# Altium PCB Gate Driver Board.PcbDoc
Units mm, origin at the board's own origin, x right, y up, seen from the top; angles counter-clockwise.
Board outline 49.05 x 43.25 mm, 2 copper layers (Top Layer, Bottom Layer); 46 components, 28 nets, 120 pads, 56 vias.
Unrouted connection lines stored in the file: 4.
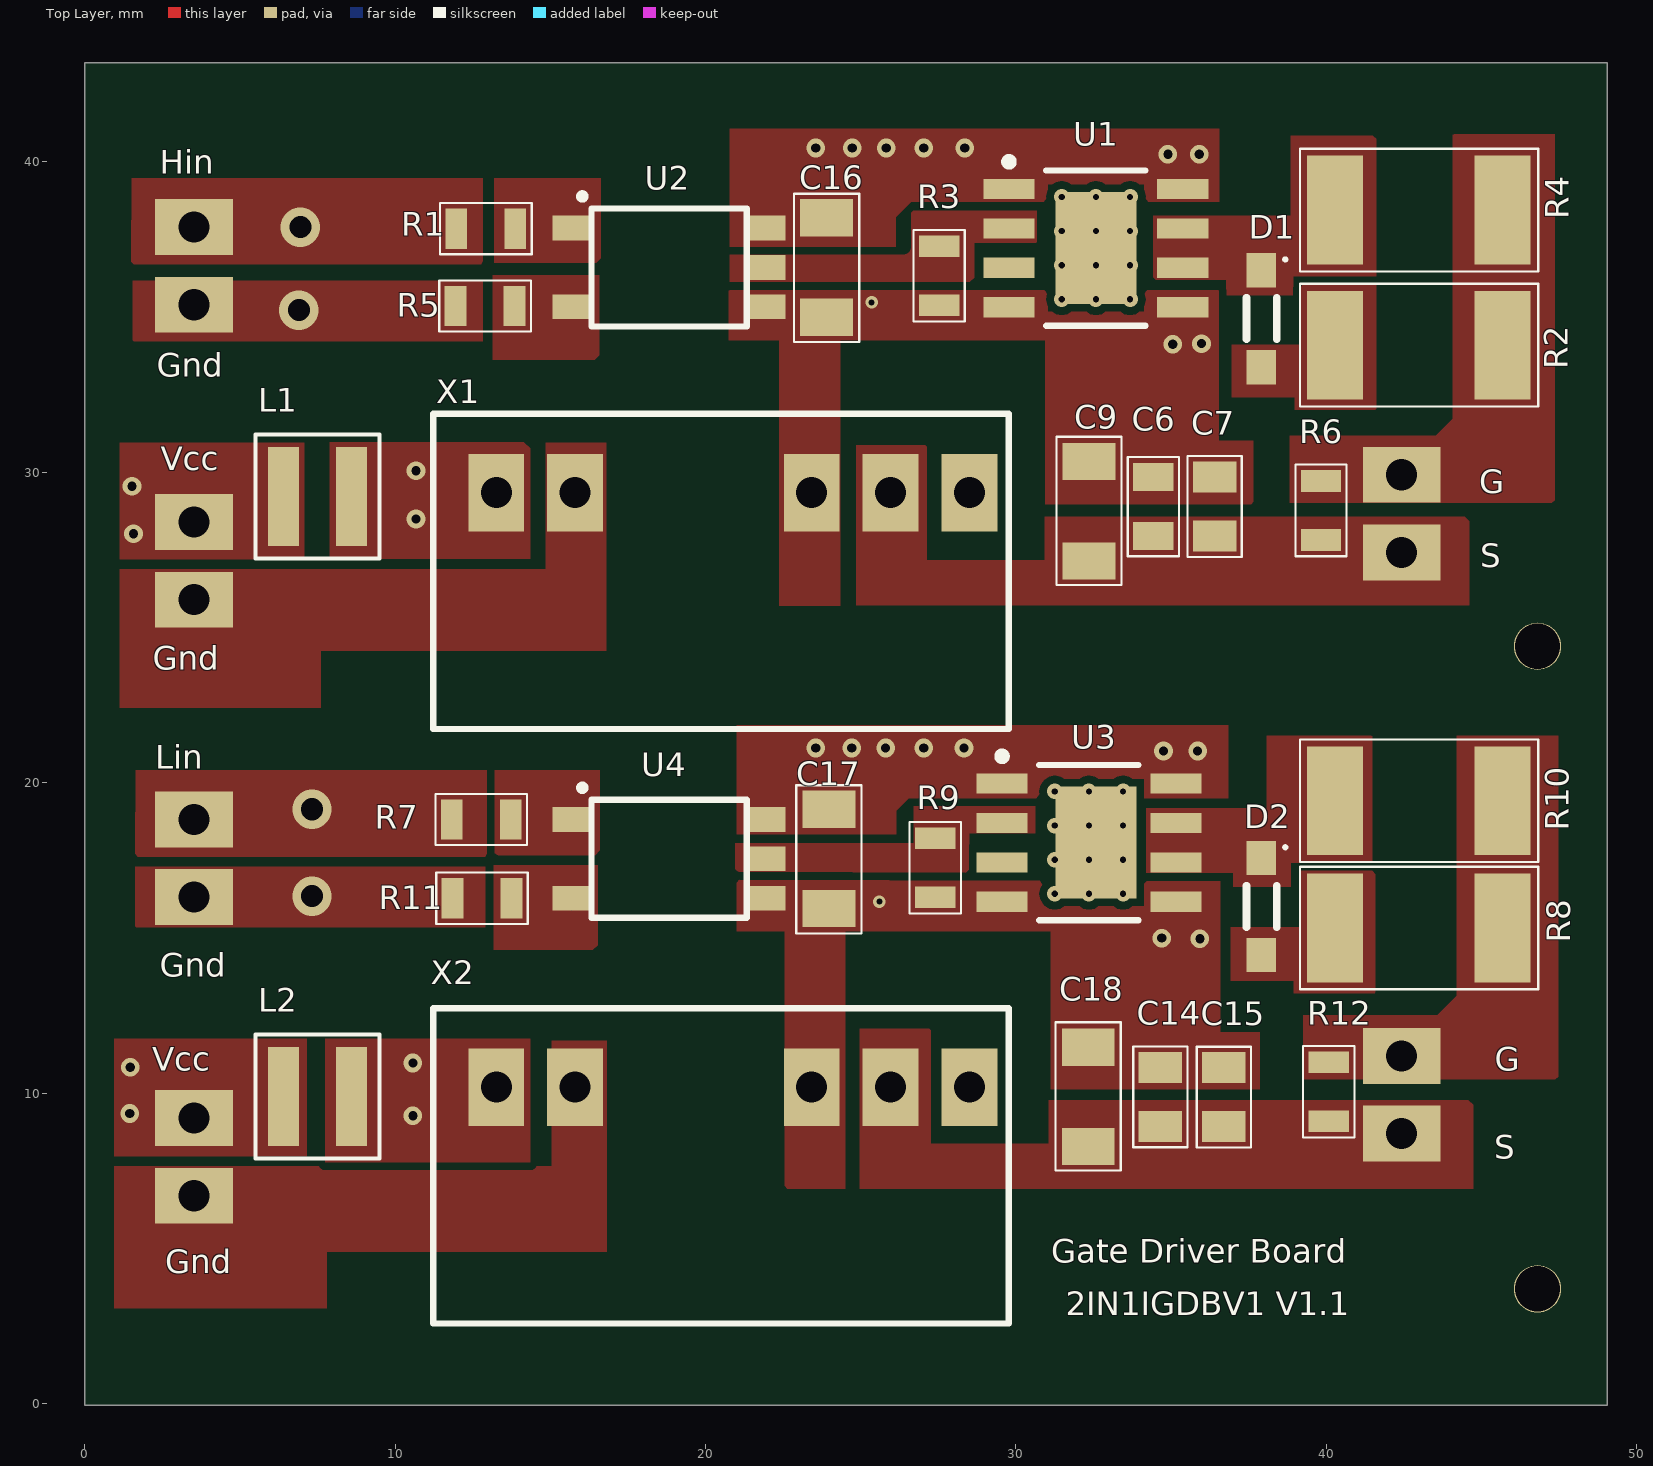
[diagram p0: Top Layer view]
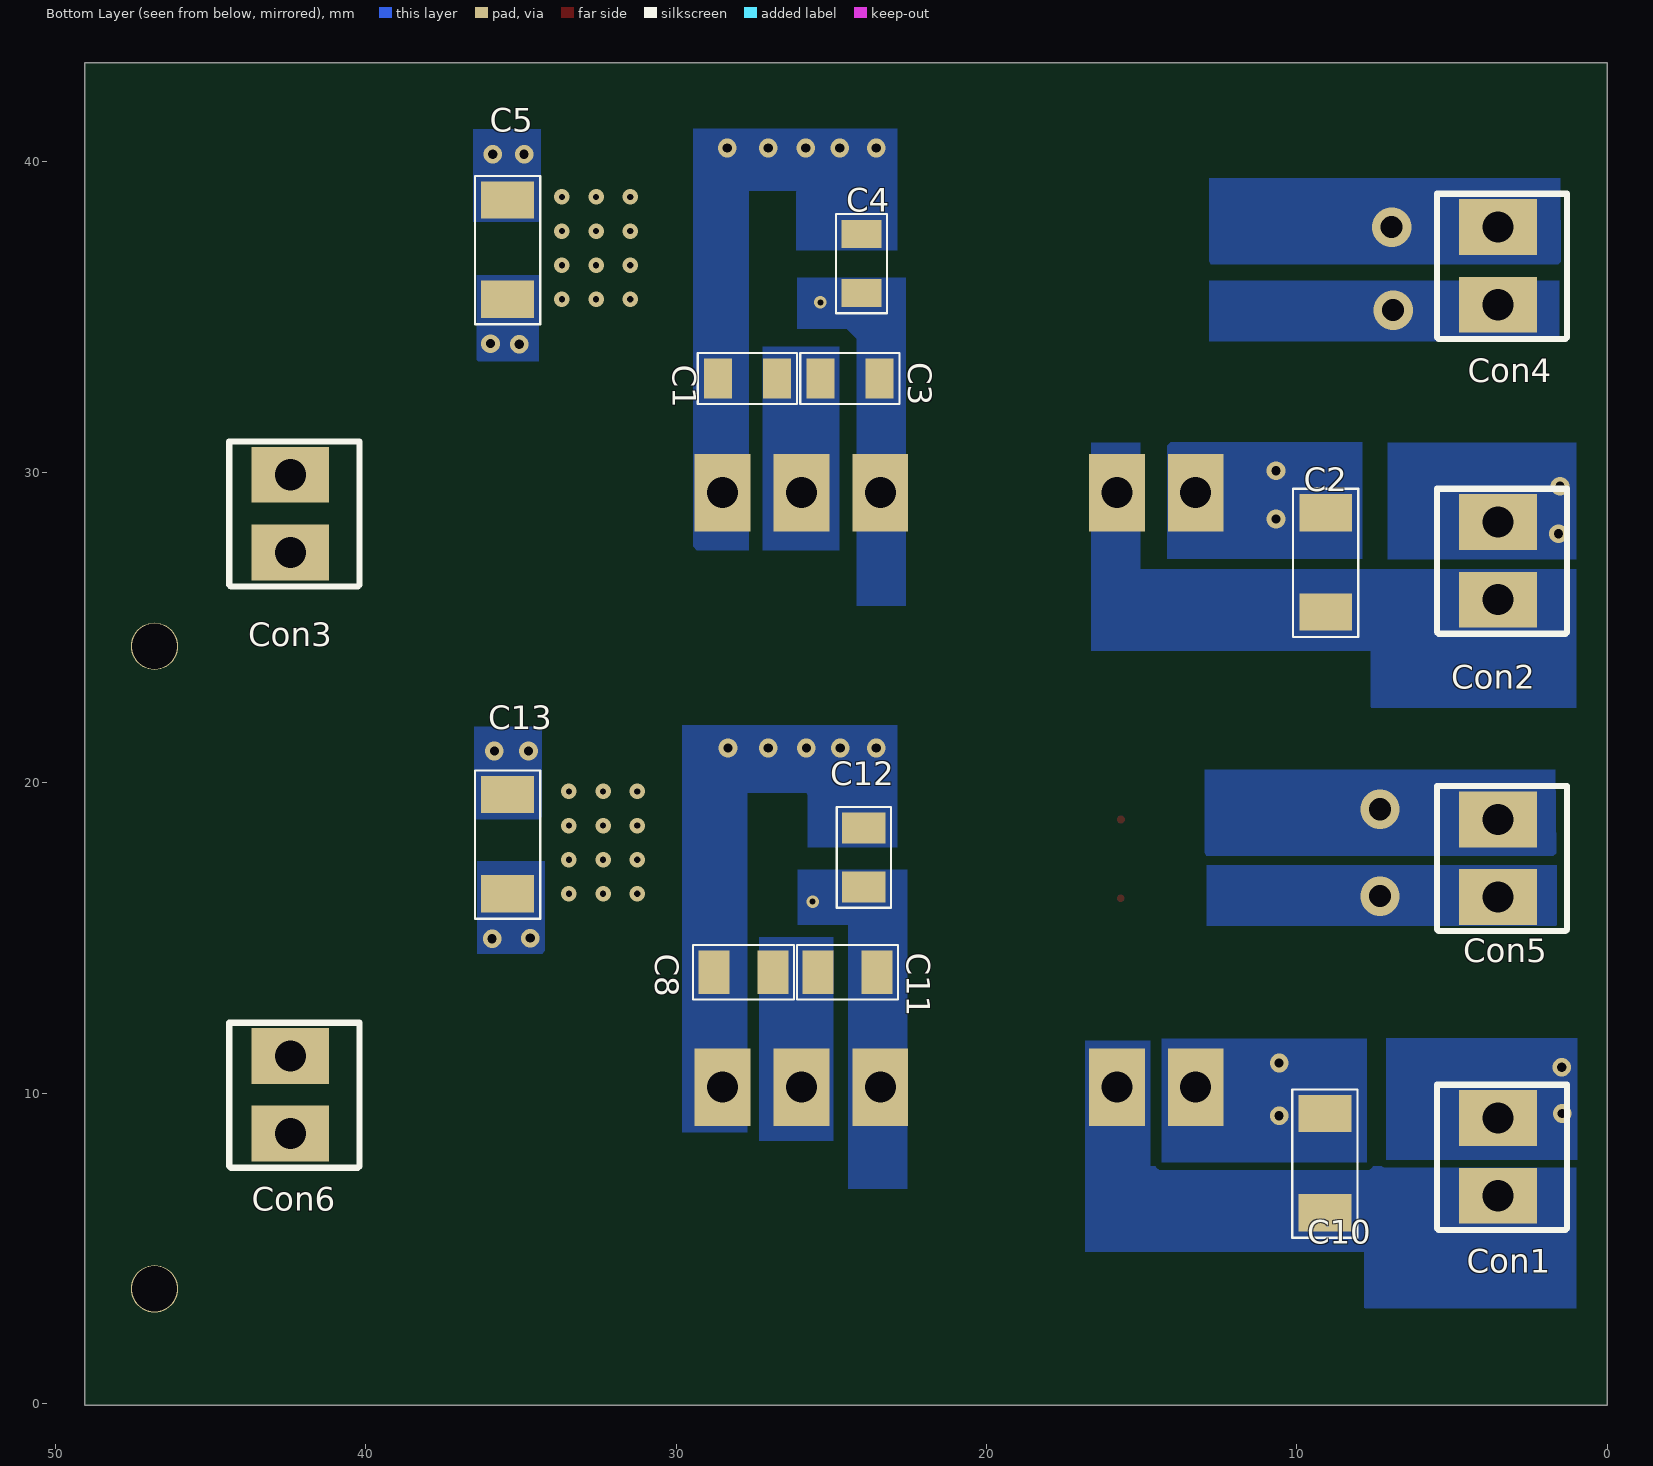
[diagram p1: Bottom Layer view, seen from below]
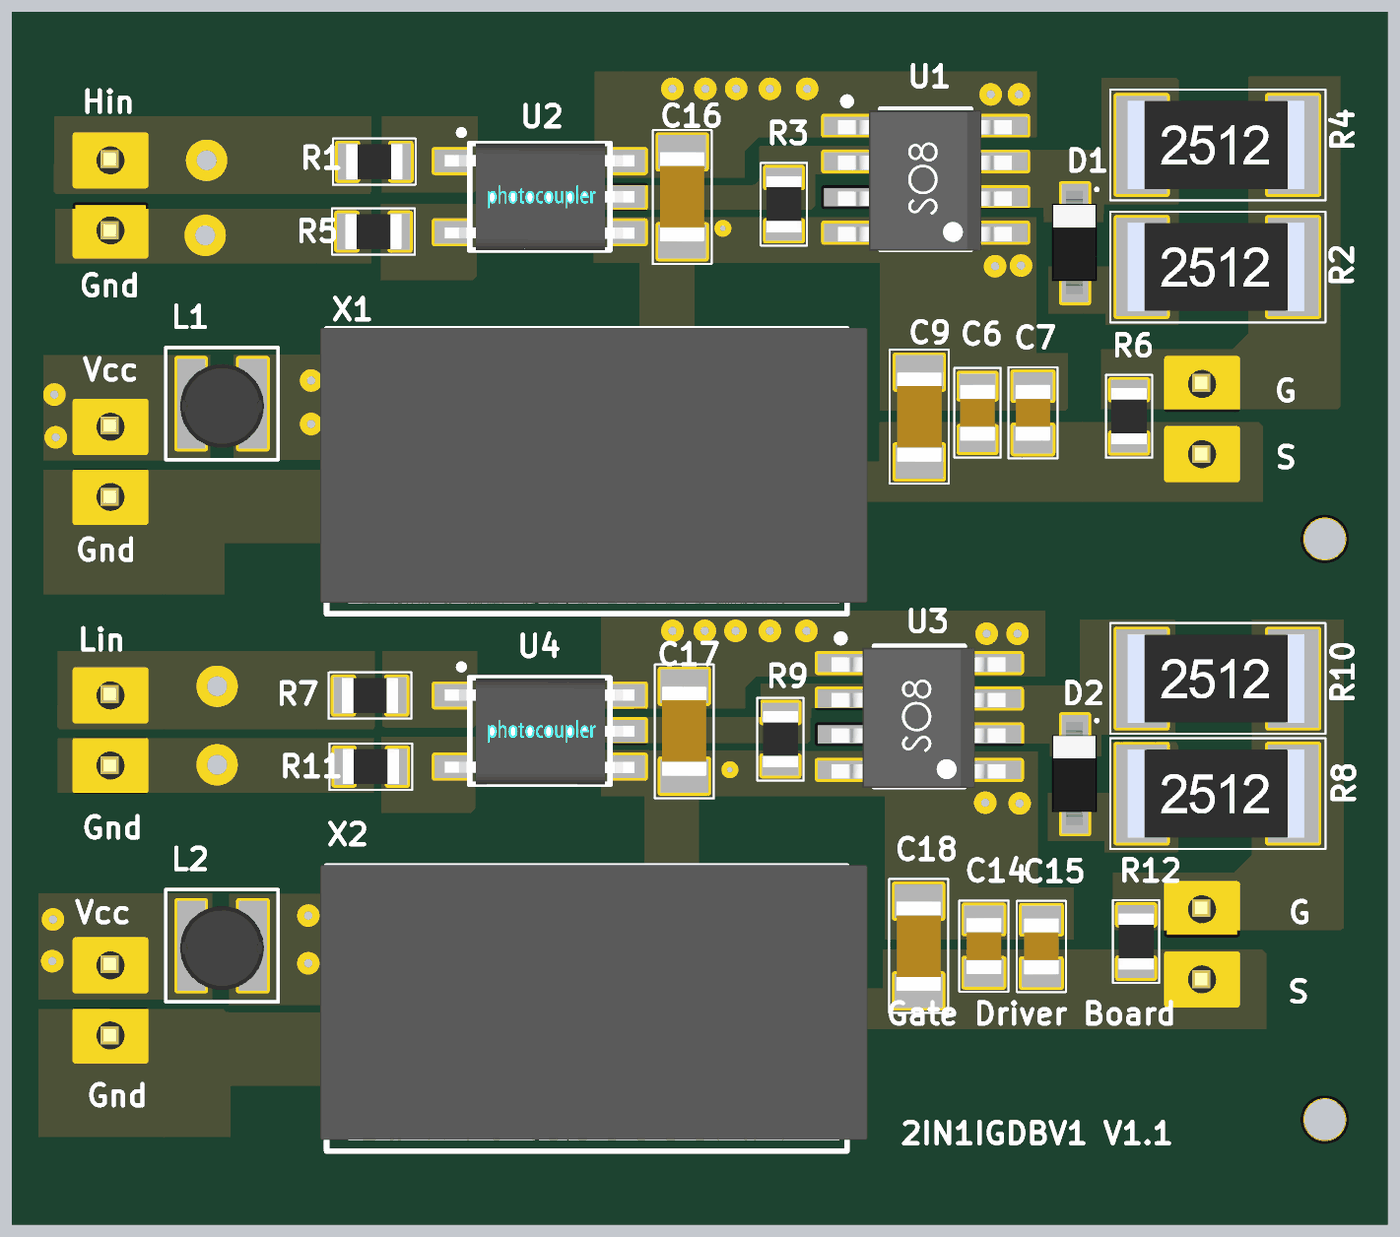
[diagram p2: 3D render of the assembled board from above, using the file's embedded part models]
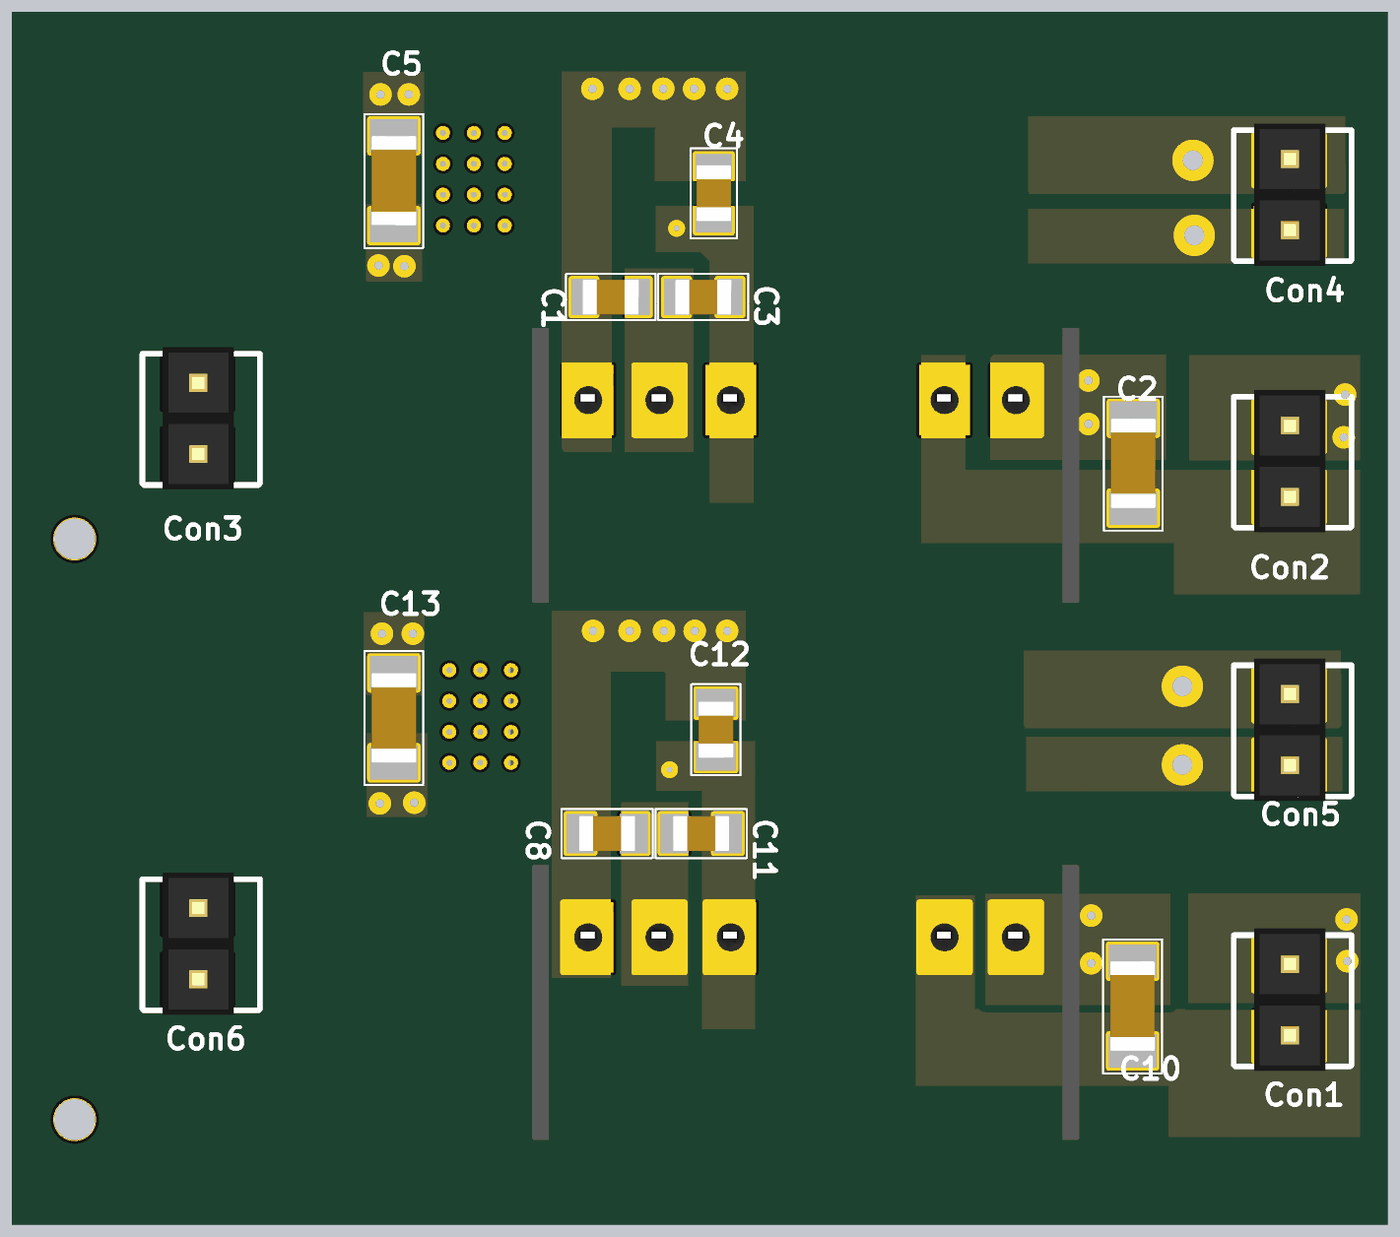
[diagram p3: 3D render of the assembled board from below, using the file's embedded part models]

## Layer stack, top to bottom
Top Solder: solder mask 0.0102, Solder Resist, Dk 3.5
Top Layer: signal copper 0.0356
Dielectric 1: dielectric 0.32, FR-4, Dk 4.8
Bottom Layer: signal copper 0.0356
Bottom Solder: solder mask 0.0102, Solder Resist, Dk 3.5

## Board outline
0,-0.05 0,43.2 49.05,43.2 49.05,-0.05

## Design rules (kind name [scope] priority, off if disabled: settings)
Clearance [All] p1: gap=0.254 ignorepadtopadclearanceinfootprint=FALSE except(0: Arc-Hole Track-Hole SMDPad-Hole THPad-Hole Via-Hole Fill-Hole Poly-Hole Region-Hole Text-Hole)
PolygonConnect PolygonConnect_1 [All] p1: connectstyle=Direct reliefconductorwidth=0.254 reliefentries=4 polygonreliefangle="90 Angle" airgapwidth=0.254
PolygonConnect [All] p2: connectstyle=Relief reliefconductorwidth=0.254 reliefentries=4 polygonreliefangle="90 Angle" airgapwidth=0.254
RoutingVias [All] p1: holewidth=0.711 width=1.27 viastyle="Through Hole" minholewidth=0.711 minwidth=1.27 maxholewidth=0.711 maxwidth=1.27
SolderMaskExpansion [All] p1: expansion=0.102 istentingtop=FALSE
Width [All] p1: maxlimit=1 minlimit=0.254 preferedwidth=0.254 minimp=50.000000 maximp=50.000000 favimp=50.000000
30 further rules are at their usual default settings.

## Components (designator, comment, footprint, x,y, rotation, side; value= is the part's Value field where it differs from the comment)
C1 "2.2u" C-0805#1 27.7,33.025 r0 bottom
C2 "4.7uF" C-1206 9.075,27.1 r90 bottom
C3 "2.2u" C-0805#1 24.4,33.025 r0 bottom
C4 "100n" C-0805#1 24.025,36.725 r90 bottom
C5 "4.7uF" C-1206 35.426,37.175 r90 bottom
C6 "10n" C-0805#1 34.425,28.9 r90 top
C7 "100n" C-0805#2 36.4,28.9 r90 top
C8 "2.2u" C-0805#2 27.825,13.9 r0 bottom
C9 "4.7uF" C-1206 32.35,28.75 r270 top
C10 "4.7uF" C-1206 9.1,7.75 r90 bottom
C11 "2.2u" C-0805#2 24.475,13.9 r0 bottom
C12 "100n" C-0805#2 23.95,17.6 r90 bottom
C13 "4.7uF" C-1206 35.426,18.025 r90 bottom
C14 "10n" C-0805#2 34.65,9.888 r90 top
C15 "100n" C-0805#2 36.7,9.875 r90 top
C16 "4.7uF" C-1206 23.9,36.6 r90 top
C17 "4.7uF" C-1206 23.975,17.55 r90 top
C18 "4.7uF" C-1206 32.325,9.888 r270 top
Con1 "Connector" Conn 3.525,9.175 r180 bottom
Con2 "Connector" Conn 3.525,28.375 r180 bottom
Con3 "Connector2_1" Conn 42.425,29.9 r180 bottom
Con4 "Connector2" Conn 3.525,37.875 r180 bottom
Con5 "Connector3" Conn 3.525,18.8 r180 bottom
Con6 "Connector2_2" Conn 42.425,11.175 r180 bottom
D1 "1n5819" SOD123 37.85,36.45 r270 top
D2 "1n5819" SOD123 37.85,17.512 r270 top
L1 "10uH" WE-TPC_282892 7.5,29.225 r90 top
L2 "10uH" WE-TPC_282892 7.5,9.9 r90 top
R1 "510" R-0805 12.925,37.85 r0 top
R2 "10 1w" R-2512 42.975,34.1 r0 top
R3 "47k" R-0805 27.525,36.337 r90 top
R4 "10 1w" R-2512 42.975,38.45 r0 top
R5 "510" R-0805 12.9,35.36 r0 top
R6 "47k" R-0805 39.825,28.775 r90 top
R7 "510" R-0805 12.775,18.82 r0 top
R8 "10 1w" R-2512 42.975,15.325 r0 top
R9 "47k" R-0805 27.4,17.263 r90 top
R10 "10 1w" R-2512 42.975,19.425 r0 top
R11 "510" R-0805 12.8,16.284 r0 top
R12 "47k" R-0805 40.075,10.05 r90 top
U1 "IXDN614" "FAN3122 Soic8"#1 32.575,37.225 r0 top
U2 "TLP152" TLP152 18.825,36.35 r0 top
U3 "IXDN614" "FAN3122 Soic8"#2 32.351,18.075 r0 top
U4 "TLP152" TLP152 18.825,17.3 r0 top
X1 "R24P21503D" SIP7 13.26,29.35 r90 top
X2 "R24P21503D" SIP7 13.26,10.2 r90 top

## Footprints (in the part's own frame and the unit in brackets; to place one, negate y for a bottom-side part, rotate by r counter-clockwise, add the part's x,y. Pads: shape width x height; smd on the part's side, far side on the other; paste and mask are expansions set on the pad)
C-0805#1 [mm]
  rect 0.9x1.3 smd: 1(-0.95,0) 2(0.95,0)
  silkscreen extent -1.6,-0.83 1.6,0.83, body extent -1,-0.62 1,0.63, height 1.01
C-0805#2 [mm]
  rect 1x1.4 smd: 1(-0.95,0) 2(0.95,0)
  silkscreen extent -1.62,-0.87 1.62,0.87, body extent -1,-0.62 1,0.63, height 1.01
C-1206 [mm]
  rect 1.2x1.7 smd: 1(-1.6,0) 2(1.6,0)
  silkscreen extent -2.4,-1.05 2.37,1.05, body extent -1.6,-0.8 1.6,0.8, height 1
Conn [mm]
  rect 2.5x1.8 hole 1: 1(0,0.025) 2(0,-2.475)
  silkscreen extent -1.96,-3.57 2.22,1.1, body extent -1.24,-3.74 1.3,1.34, height 8.15
"FAN3122 Soic8"#1 [mm] "SOIC, 8-Leads, Body 4.95x3.95mm, Pitch 1.27mm, Thermal Pad 4.10x3.10mm, IPC Medium Density"
  rect 1.65x0.65 smd: 1(-2.8,1.905) 2(-2.8,0.635) 3(-2.8,-0.635) 4(-2.8,-1.905) 5(2.8,-1.905) 6(2.8,-0.635) 7(2.8,0.635) 8(2.8,1.905)
  rect 2.6x3.6 smd: 9(0,0)
  silkscreen extent -2.92,-2.5 1.6,2.9, body extent -3.12,-2.55 3.08,2.45, height 1.66
"FAN3122 Soic8"#2 [mm] "SOIC, 8-Leads, Body 4.95x3.95mm, Pitch 1.27mm, Thermal Pad 4.10x3.10mm, IPC Medium Density"
  rect 1.65x0.65 smd: 1(-2.8,1.905) 2(-2.8,0.635) 3(-2.8,-0.635) 4(-2.8,-1.905) 5(2.8,-1.905) 6(2.8,-0.635) 7(2.8,0.635) 8(2.8,1.905)
  rect 2.6x3.6 smd: 9(0.224,0)
  silkscreen extent -2.92,-2.5 1.6,2.9, body extent -3.12,-2.55 3.08,2.45, height 1.66
R-0805 [mm]
  rect 0.7x1.3 smd: 1(-0.95,0) 2(0.95,0)
  silkscreen extent -1.47,-0.82 1.48,0.82, body extent -1,-0.62 1,0.62, height 0.56
R-2512 [mm]
  rect 1.8x3.5 smd: 1(-2.7,0) 2(2.7,0)
  silkscreen extent -3.83,-1.97 3.85,1.97, body extent -3.21,-1.57 3.09,1.58, height 0.59
SIP7 [mm]
  rect 2.5x1.8 hole 1: 1(0,0) 2(0,-2.54) 5(0,-10.16) 6(0,-12.7) 7(0,-15.24)
  silkscreen extent -7.62,-16.51 2.54,2.03, body extent -7.24,-17.24 2.58,2.26, height 11.66
SOD123 [mm]
  rect 1.1x0.95 smd: a(3.062,0.05) k(-0.063,0.05)
  silkscreen extent -0.46,-0.42 2.15,0.87, body extent -0.37,-0.77 3.33,0.83, height 1.28
TLP152 [mm] "SOTFL, 5-Leads, Body 3.75x7.20mm, Pitch 1.27mm, IPC Medium Density"
  rect 1.2x0.8 smd: 1(-3.15,1.524) 2(-3.15,-1.016) 3(3.15,-1.016) 4(3.15,0.254) 5(3.15,1.524)
  silkscreen extent -2.87,-1.65 2.5,2.61, body extent -3.39,-1.65 3.38,2.15, height 2.11
WE-TPC_282892 [mm]
  rect 3.2x1 smd: 1(0,1.1) 2(0,-1.1)
  silkscreen extent -2,-2 2,2, body extent -1.58,-1.5 1.41,1.5, height 3

## Part data
C1 C3 C4 C6 C7 C8 C11 C12 C14 C15: library part C-0805
C2 C9 C10 C18: library part Cap1206
C5 C13 C16 C17: library part C-1206
D1 D2: library part 1N4148W-E3-18, "Diode Small Signal Switching 100V 0.15A 2-Pin SOD-123 T/R", Average Rectified Current=150mA, Forward Voltage=1.2V, Manufacturer=Vishay, Max Operating Temperature=150°C, Max Power Dissipation=350mW, Max Repetitive Reverse Voltage (Vrrm)=100V, Max Reverse Leakage Current=5uA, Max Reverse Voltage (DC)=75V, Max Surge Current=2A, Min Operating Temperature=-55°C, Package Quantity=10000, Peak Reverse Current=100uA, Supplier Part Number 1=70061597, ComponentLink1Description=https://datasheet.ciiva.com/29885/1n4148w-29885941.pdf?src-supplier=Avnet, ComponentLink1URL=https://datasheet.ciiva.com/29885/1n4148w-29885941.pdf?src-supplier=Avnet, ComponentLink2Description=https://datasheet.ciiva.com/29593/1n4148w-29593113.pdf?src-supplier=Digi-Key, ComponentLink2URL=https://datasheet.ciiva.com/29593/1n4148w-29593113.pdf?src-supplier=Digi-Key, ComponentLink3Description=https://datasheet.ciiva.com/29593/1n4148w-29593111.pdf?src-supplier=Digi-Key, ComponentLink3URL=https://datasheet.ciiva.com/29593/1n4148w-29593111.pdf?src-supplier=Digi-Key, ComponentLink4Description=https://datasheet.ciiva.com/29593/1n4148w-29593112.pdf?src-supplier=Digi-Key, ComponentLink4URL=https://datasheet.ciiva.com/29593/1n4148w-29593112.pdf?src-supplier=Digi-Key, Contact Plating=Tin, Element Configuration=Single, Forward Current=150mA, Height=1.25mm, Lead Free="Lead Free", Length=2.85mm, Manufacturer Part Number=1N4148W-E3-18, Mount="Surface Mount", Number of Pins=2, Packaging="Tape and Reel", Peak Non-Repetitive Surge Current=2A, Power Dissipation=350mW, Pricing 1="1 = 0.03900, 25 = 0.03800, 100 = 0.03600, 250 = 0.03400, 500 = 0.03200, 1000 = 0.03100, 2500 = 0.02900 (USD)", Radiation Hardening=No, Recovery Time=4ns, Reverse Recovery Time=4ns, RoHS=Yes, Stock 1=6838, Supplier 1="Allied Electronics", Weight=0.000363oz, Width=1.7mm
L1 L2: library part inductor
R1 R3 R5 R6 R7 R9 R11 R12: library part Res0805
R2 R4 R8 R10: library part R-2512
U1 U3: library part IXDN614SITR, "14A 8SOIC EXP MTL NON INVERTING", Case/Package=SOIC, Manufacturer="Ixys Clare", Max Operating Temperature=125°C, Max Output Current=14A, Max Supply Voltage=35V, Min Operating Temperature=-40°C, Min Supply Voltage=4.5V, Package Quantity=2000, Supplier Part Number 1=849-IXDN614SITR, ComponentLink1Description=https://datasheet.ciiva.com/6613/ixd-614-6613145.pdf?src-supplier=Digi-Key, ComponentLink1URL=https://datasheet.ciiva.com/6613/ixd-614-6613145.pdf?src-supplier=Digi-Key, Fall Time=25ns, Lead Free="Lead Free", Manufacturer Part Number=IXDN614SITR, Mount="Surface Mount", Number of Drivers=1, Number of Outputs=1, Number of Pins=8, Packaging="Tape and Reel", Pricing 1="1 = 4.24000, 10 = 3.79000, 50 = 3.41000, 100 = 3.10000, 1000 = 2.12000, 10000 = 1.90000 (USD)", Propagation Delay=70ns, Rise Time=35ns, RoHS=Yes, Supplier 1=Mouser
U2 U4: library part TLP152(TPL,E, "OPTOISO 3.75KV GATE DRIVER 6SO-5", Case/Package=SO, Forward Current=10mA, Forward Voltage=1.57V, High Level Output Current=2A, Manufacturer=Toshiba, Max Operating Temperature=100°C, Max Output Current=2.5A, Max Power Dissipation=260mW, Min Operating Temperature=-40°C, Package Quantity=3000, Supplier Part Number 1=757-TLP152TPLE, ComponentLink1Description=https://datasheet.ciiva.com/41848/tlp152-datasheet-en-20120914-41848928.pdf?src-supplier=Digi-Key, ComponentLink1URL=https://datasheet.ciiva.com/41848/tlp152-datasheet-en-20120914-41848928.pdf?src-supplier=Digi-Key, Direction=Unidirectional, Fall Time=22ns, Low Level Output Current=2A, Manufacturer Part Number=TLP152(TPL,E, Mount="Surface Mount", Number of Channels=1, Number of Pins=5, Output Current=2.5A, Packaging="Tape and Reel", Pricing 1="1 = 1.55000, 10 = 0.96800, 50 = 0.96800, 100 = 0.87200, 1000 = 0.54300, 10000 = 0.44000 (USD)", Propagation Delay=165ns, Pulse Width Distortion (PWD)=50ns, Rise Time=18ns, RoHS=Yes, Stock 1=22321, Supplier 1=Mouser, Turn-On Delay Time=190ns
X1 X2: Manufacturer=Recom, Max Output Voltage=15V, Supplier Part Number 1=945-3071-5-ND, Height=12.5mm, Length=19.5mm, Manufacturer Part Number=R24P21503D, Pricing 1="1 = 8.78000, 5 = 8.71200, 10 = 8.64500, 25 = 8.51200, 50 = 8.24600, 100 = 7.44800, 250 = 7.31500, 500 = 7.18200 (USD)", RoHS=No, Stock 1=378, Supplier 1=Digi-Key, Weight=4.3g, Width=9.8mm
Con1 Con2 Con3 Con6: System=Connector
Con4: Parameter 1=Connector

## Free pads (board coordinates)
  round 1.524 hole 1.462: 1(46.8,24.4) 4(46.8,3.7)

## Via types
v1: diameter 0.6, hole 0.3, Top Layer to Bottom Layer, 26 vias
v2: diameter 0.5, hole 0.2, Top Layer to Bottom Layer, 24 vias
v3: diameter 1.27, hole 0.711, Top Layer to Bottom Layer, 4 vias
v4: diameter 0.4, hole 0.2, Top Layer to Bottom Layer, 2 vias

## Nets (pads, with @x,y where several pads share a name; then routed paths per layer and width w, separated by ;. In a path a pad name is that pad's centre, name@x,y a point inside that pad or via, vN(x,y) a via of type N, cw(c..) or ccw(c..) an arc to the next point about the centre after c; other vN are vias at no path point)
GND: C2.1 Con2.2 X1.2 | length 0.6
  Top Layer w0.254: X1.2 X1.2@15.8,30
GND1: C10.1 Con1.2 X2.2 | length 0
  Top Layer w0.254: X2.2@16.05,10.2 X2.2@16.056,10.206
NetC2_2: C2.2 L1.2 X1.1
  other v1: 10.675,28.5 10.675,30.05
NetC10_2: C10.2 L2.2 X2.1
  other v1: 10.575,9.275 10.575,10.975
NetCon3_1: Con3.1 R2.2 R4.2 R6.2
NetCon4_1: Con4.1 R1.1
  other v3: 6.95,37.9
NetCon4_2: Con4.2 R5.1
  other v3: 6.9,35.225
NetCon5_1: Con5.1 R7.1
  other v3: 7.325,19.15
NetCon5_2: Con5.2 R11.1
  other v3: 7.325,16.35
NetCon6_1: Con6.1 R8.2 R10.2 R12.2
NetD1_a: D1.a R2.1
NetD1_k: D1.k R4.1 U1.6 U1.7
NetD2_a: D2.a R8.1
NetD2_k: D2.k R10.1 U3.6 U3.7
NetR1_2: R1.2 U2.1
NetR3_2: R3.2 U1.2 U2.4
NetR5_2: R5.2 U2.2
NetR7_2: R7.2 U4.1 | length 0
  Top Layer w0.254: U4.1@15.671,18.82 U4.1
NetR9_2: R9.2 U3.2 U4.4
NetR11_2: R11.2 U4.2 | length 0
SourceH: C1.1 C3.2 C6.1 C7.1 C9.2 Con3.2 R6.1 X1.6
SourceL: C8.1 C11.2 C14.1 C15.1 C18.2 Con6.2 R12.1 X2.6
VCC: Con2.1 L1.1
  other v1: 1.575,28.025 1.525,29.55
VCC1: Con1.1 L2.1
  other v1: 1.45,9.35 1.475,10.838
VccH: C1.2 C4.2 C5.2 C16.2 U1.1 U1.8 U2.5 X1.7
  other v1: 34.894,40.25 35.9,40.25 23.55,40.45 24.725,40.45 25.825,40.45 27.025,40.45 28.35,40.45
VccL: C8.2 C12.2 C13.2 C17.2 U3.1 U3.8 U4.5 X2.7
  other v1: 34.75,21.025 35.85,21.025 23.55,21.125 24.705,21.125 25.8,21.125 27.025,21.125 28.325,21.125
VeeH: C3.1 C4.1 C5.1 C6.2 C7.2 C9.1 C16.1 R3.1 U1.4 U1.5 U2.3 X1.5
  other v1: 35.05,34.125 35.975,34.15
  other v4: 25.35,35.475
VeeL: C11.1 C12.1 C13.1 C14.2 C15.2 C17.1 C18.1 R9.1 U3.4 U3.5 U4.3 X2.5
  other v1: 35.925,14.975 34.7,15
  other v4: 25.6,16.175
pads on no net: U1.3 U1.9 U3.3 U3.9
copper on no net:
  other v2: 31.251,16.425 32.351,16.425 33.451,16.425 31.251,17.525 32.351,17.525 33.451,17.525 31.251,18.625 32.351,18.625 33.451,18.625 31.251,19.725 32.351,19.725 33.451,19.725 31.475,35.575 32.575,35.575 33.675,35.575 31.475,36.675 32.575,36.675 33.675,36.675 31.475,37.775 32.575,37.775 33.675,37.775 31.475,38.875 32.575,38.875 33.675,38.875

## Polygon pours and split planes (outlines as drawn)
NetR9_2 on Top Layer "Top Layer-NetR9_2" (solid, remove dead copper, pour order 142): 20.95,18.05 26.7,18.05 26.7,19.275 30.625,19.275 30.625,18.375 28.5,18.375 28.5,17.02 20.95,17.02
NetR3_2 on Top Layer "Top Layer-NetR3_2" (solid, remove dead copper, pour order 140): 20.775,37.075 26.525,37.075 26.525,38.3 26.65,38.425 30.675,38.425 30.675,37.425 30.65,37.4 28.65,37.4 28.65,36.276 28.651,36.275 28.451,36.075 20.775,36.075
NetR11_2 on Top Layer "Top Layer-NetR11_2" (solid, remove dead copper, pour order 138): 13.175,17.35 16.525,17.35 16.525,14.775 16.375,14.625 13.175,14.625
NetR7_2 on Top Layer "Top Layer-NetR7_2" (solid, remove dead copper, pour order 136): 13.175,20.4 16.6,20.4 16.6,17.825 16.45,17.675 13.175,17.675
NetR5_2 on Top Layer "Top Layer-NetR5_2" (solid, remove dead copper, pour order 134): 13.15,36.35 16.575,36.35 16.575,33.775 16.425,33.625 13.15,33.625
NetR1_2 on Top Layer "Top Layer-NetR1_2" (solid, remove dead copper, pour order 132): 13.2,39.475 16.625,39.475 16.625,36.9 16.475,36.75 13.2,36.75
NetCon5_2 on Top Layer "Top Layer-NetCon5_2" (solid, remove dead copper, pour order 126): 1.637,17.3 12.903,17.3 12.912,17.31 12.912,15.35 1.662,15.35 1.637,15.375
NetCon5_1 on Top Layer "Top Layer-NetCon5_1" (solid, remove dead copper, pour order 124): 1.65,20.4 12.95,20.4 12.95,17.625 12.925,17.6 12.9,17.625 1.625,17.625
NetCon4_2 on Top Layer "Top Layer-NetCon4_2" (solid, remove dead copper, pour order 118): 1.55,36.175 12.815,36.175 12.825,36.185 12.825,34.225 1.575,34.225 1.55,34.25
NetCon4_1 on Top Layer "Top Layer-NetCon4_1" (solid, remove dead copper, pour order 116): 1.525,39.475 12.825,39.475 12.825,36.7 12.8,36.675 12.775,36.7 1.5,36.7
NetD1_k on Top Layer "Top Layer-NetD1_k" (solid, pour order 110): 34.425,38.275 38.85,38.275 38.85,40.85 41.5,40.85 41.6,40.75 41.6,36.325 38.925,36.325 38.925,35.7 36.775,35.7 36.775,36.2 34.415,36.2 34.415,36.75
VccH on Top Layer "Top Layer-VccH" (solid, pour order 62): 36.55,41.075 20.775,41.075 20.775,37.275 26.125,37.275 26.125,38.225 26.625,38.725 36.55,38.725
VeeH on Top Layer "Top Layer-VeeH" (solid, pour order 50): 20.775,35.875 20.75,35.85 20.75,34.25 22.375,34.25 22.375,25.7 24.337,25.7 24.337,34.25 30.942,34.25 30.942,28.975 37.575,28.975 37.65,29.05 37.65,31.025 36.528,31.025 36.528,35.875
NetC10_2 on Top Layer "Top Layer-NetC10_2" (solid, pour order 98): 14.35,11.75 7.75,11.75 7.75,7.775 14.35,7.775
VCC1 on Top Layer "Top Layer-VCC1" (solid, pour order 96): 0.95,11.762 7.15,11.763 7.15,7.975 0.95,7.975
NetC2_2 on Top Layer "Top Layer-NetC2_2" (solid, pour order 94): 14.35,30.775 14.15,30.975 7.9,30.975 7.9,27.225 14.35,27.225
VCC on Top Layer "Top Layer-VCC" (solid, pour order 92): 1.125,30.95 7.075,30.95 7.075,27.2 1.125,27.2
GND1 on Top Layer "Top Layer-GND1" (solid, pour order 40): 0.95,7.65 15.05,7.65 15.05,11.7 16.825,11.7 16.825,4.9 7.825,4.9 7.8,4.875 7.8,3.075 0.95,3.075
GND on Top Layer "Top Layer-GND" (solid, pour order 34): 1.125,26.875 14.85,26.875 14.85,30.962 16.8,30.962 16.8,24.25 7.625,24.25 7.6,24.275 7.6,22.425 1.125,22.425
VccL on Top Layer "Top Layer-VccL" (solid, pour order 64): 36.841,21.85 21.002,21.85 21.002,18.35 26.15,18.35 26.15,19.1 26.55,19.5 36.841,19.5
NetD2_a on Top Layer "Top Layer-NetD2_a" (solid, pour order 60): 36.925,15.35 36.925,13.625 38.95,13.625 38.95,13.225 41.55,13.225 41.575,13.25 41.575,17.25 39.2,17.25 39.175,17.275 39.15,17.25 39.15,15.35
NetD2_k on Top Layer "Top Layer-NetD2_k" (solid, pour order 58): 34.2,19.175 34.2,17.1 37,17.1 37,16.65 38.85,16.65 38.85,17.39 38.85,17.425 38.835,17.425 41.475,17.425 41.475,21.5 41.45,21.525 38.075,21.525 38.075,19.175
NetD1_a on Top Layer "Top Layer-NetD1_a" (solid, pour order 56): 36.95,34.11 36.95,32.425 38.975,32.425 38.975,32.025 41.575,32.025 41.6,32.05 41.6,36.05 39.225,36.05 39.2,36.075 39.175,36.05 39.175,34.11
VeeL on Top Layer "Top Layer-VeeL" (solid, pour order 52): 20.998,16.876 21.002,15.225 22.55,15.225 22.55,6.925 24.5,6.925 24.5,15.225 31.125,15.225 31.125,10.125 37.85,10.125 37.85,11.975 36.575,11.975 36.575,16.825
NetCon6_1 on Top Layer "Top Layer-NetCon6_1" (solid, pour order 48): 39.25,10.45 47.375,10.45 47.4,10.425 47.475,10.5 47.475,21.525 45.05,21.525 44.2,21.525 44.2,13.15 43.565,12.515 39.25,12.515
SourceL on Top Layer "Top Layer-SourceL" (solid, pour order 46): 24.975,12.075 24.975,6.925 44.725,6.925 44.725,9.625 44.575,9.775 31.05,9.775 31.05,8.375 27.25,8.375 27.25,12.025 27.2,12.075
NetCon3_1 on Top Layer "Top Layer-NetCon3_1" (solid, pour order 44): 38.825,29.025 47.25,29.025 47.275,29 47.35,29.075 47.35,40.9 44.125,40.9 44.075,40.95 44.075,31.725 43.525,31.175 38.825,31.175
SourceH on Top Layer "Top Layer-SourceH" (solid, pour order 42): 24.85,30.875 24.85,25.725 44.6,25.725 44.6,28.425 44.45,28.575 30.925,28.575 30.925,27.175 27.125,27.175 27.125,30.825 27.075,30.875
NetCon5_1 on Bottom Layer "Bottom Layer-NetCon5_1" (solid, remove dead copper, pour order 130): 1.675,20.425 12.975,20.425 12.975,17.65 12.95,17.625 12.925,17.65 1.65,17.65
NetCon5_2 on Bottom Layer "Bottom Layer-NetCon5_2" (solid, remove dead copper, pour order 128): 1.625,17.35 12.89,17.35 12.9,17.36 12.9,15.4 1.65,15.4 1.625,15.425
NetCon4_2 on Bottom Layer "Bottom Layer-NetCon4_2" (solid, remove dead copper, pour order 122): 1.55,36.175 12.815,36.175 12.825,36.185 12.825,34.225 1.575,34.225 1.55,34.25
NetCon4_1 on Bottom Layer "Bottom Layer-NetCon4_1" (solid, remove dead copper, pour order 120): 1.525,39.475 12.825,39.475 12.825,36.7 12.8,36.675 12.775,36.7 1.5,36.7
VCC1 on Bottom Layer "Bottom Layer-VCC1" (solid, pour order 108): 0.975,11.775 7.125,11.775 7.125,7.862 0.975,7.862
VCC on Bottom Layer "Bottom Layer-VCC" (solid, pour order 106): 1,30.95 7.075,30.95 7.075,27.2 1,27.2
NetC10_2 on Bottom Layer "Bottom Layer-NetC10_2" (solid, pour order 104): 7.75,11.75 14.35,11.75 14.35,7.784 7.75,7.784
NetC2_2 on Bottom Layer "Bottom Layer-NetC2_2" (solid, pour order 102): 7.9,30.975 14.15,30.975 14.175,30.95 14.175,27.225 7.9,27.225
SourceL on Bottom Layer "Bottom Layer-SourceH" (solid, pour order 100): 24.938,15.025 27.325,15.025 27.325,8.475 24.938,8.475
VccL on Bottom Layer "Bottom Layer-VccL" (solid, pour order 90): 29.8,8.75 29.8,21.85 22.875,21.85 22.875,17.925 25.75,17.925 25.75,19.625 25.8,19.675 27.7,19.675 27.7,8.75
VccH on Bottom Layer "Bottom Layer-VccH" (solid, pour order 88): 29.475,27.5 29.45,27.525 29.45,41.075 22.875,41.075 22.875,37.15 26.125,37.15 26.125,39.037 26.087,39.075 27.662,39.075 27.65,39.057 27.65,27.5
SourceH on Bottom Layer "Bottom Layer-SourceH" (solid, pour order 86): 24.75,34.05 27.2,34.05 27.2,27.5 24.75,27.5
VeeL on Bottom Layer "Bottom Layer-VeeL" (solid, pour order 84): 34.226,17.475 36.4,17.475 36.4,14.5 34.225,14.5
VccL on Bottom Layer "Bottom Layer-VccL 1" (solid, pour order 82): 34.326,21.8 36.5,21.8 36.5,18.825 34.325,18.825
VeeH on Bottom Layer "Bottom Layer-VeeH" (solid, pour order 80): 34.425,36.35 36.425,36.35 36.425,33.625 36.375,33.575 34.425,33.575
VccH on Bottom Layer "Bottom Layer-VccH 1" (solid, pour order 78): 34.351,41.05 36.525,41.05 36.525,38.075 34.35,38.075
VeeL on Bottom Layer "Bottom Layer-VeeL 1" (solid, pour order 74): 24.45,6.925 24.45,15.4 24.475,15.425 26.075,15.425 26.075,17.2 22.55,17.2 22.55,6.925
VeeH on Bottom Layer "Bottom Layer-VeeH 1" (solid, pour order 72): 24.175,25.7 24.175,34.3 24.5,34.625 26.1,34.625 26.1,36.275 22.6,36.275 22.6,25.7
GND1 on Bottom Layer "Bottom Layer-GND1" (solid, pour order 38): 1,7.65 14.725,7.65 14.725,11.7 16.825,11.7 16.825,4.9 7.825,4.9 7.825,3.1 7.8,3.075 1,3.075
GND on Bottom Layer "Bottom Layer-GND" (solid, pour order 36): 1,26.875 15.05,26.875 15.05,30.962 16.625,30.962 16.625,24.25 7.625,24.25 7.625,22.45 7.6,22.425 1,22.425

## Silkscreen, mask and mechanical layers (free items; w line width, h text height)
Top Overlay:
  text "Hin" at 2.425,39.625 h0.76
  text "Gnd" at 2.325,33.075 h0.76
  text "Vcc" at 2.45,30.075 h0.76
  text "G" at 44.925,29.325 h0.76
  text "S" at 44.95,26.95 h0.76
  text "Gnd" at 2.2,23.65 h0.76
  text "Lin" at 2.275,20.45 h0.76
  text "Gnd" at 2.425,13.75 h0.76
  text "Vcc" at 2.175,10.725 h0.76
  text "G" at 45.425,10.725 h0.76
  text "S" at 45.4,7.9 h0.76
  text "Gate Driver Board" at 31.137,4.55 h0.76
  text "Gnd" at 2.6,4.2 h0.76
  text "2IN1IGDBV1 V1.1" at 31.6,2.85 h0.76
Mechanical 1:
  lines w0.26: 0,-0.05 0,15.313 0,27.887 0,35.997 0,39.591 0,43.2 49.05,43.2 49.05,32.337 49.05,26.731 49.05,16.419 49.05,10.813 49.05,-0.05 0,-0.05